# EAGLE board OSO-MISC-21-024 Temperature + GPIO + I2C Alternate 2 (EAGLE 9.6.2)
REV: D
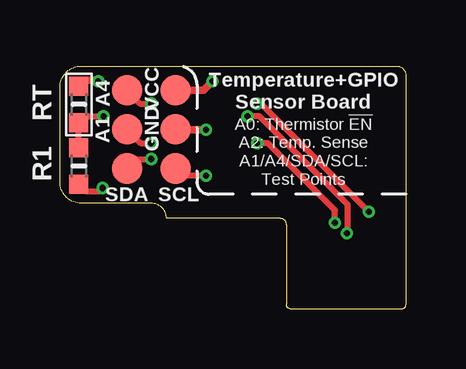
[diagram p0: board, top side]
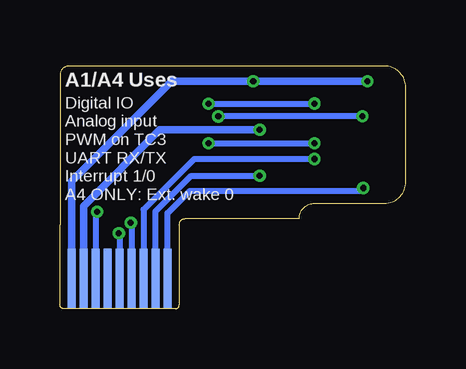
[diagram p1: board, bottom side, seen from below]

Size 14.43 x 10.1 mm. Coordinates in mm from the lower left corner, seen from the top.
Outline: 9.45,3.5 arc90 9.2,3.75 4.45,3.75 arc90 3.81,4.39 0.89,4.39 arc-90 0,5.28 0,9.21 arc-90 0.89,10.1 14.05,10.1 arc-90 14.43,9.72 14.43,3.5
Copper layers (1*16): Top 0.035559375mm / dielectric 1.6mm / Bottom 0.035559375mm
Design rules "oshpark-2layer *": minimum track width 6mil, minimum drill 10mil, track to track 6mil, track to pad 6mil, pad to pad 6mil, via to via 6mil, smd to smd 6mil, copper to edge 15mil, drill to drill 6mil, minimum pad ring 5mil, minimum via ring 5mil, stop-mask expansion 2.5mil, vias tented up to drill 12mil, thermal gap 10mil
Net classes: 0 default: width 0.203 mm; 1 power: width 0.203 mm; 2 gnd: width 0.203 mm

## Footprints (pad centres in the part's own frame; a part is rotated, then mirrored left to right if it is on the bottom)
B1,27 = smd 1.27 x 1.27: TP 0,0
_0603MP = smd 0.8 x 0.8: 1 -0.762,0; 2 0.762,0
FH19C9S05SH10-FFC = smd 0.347 x 2.5 bottom: 1 2,-2.25; 2 1.5,-2.25; 3 1,-2.25; 4 0.5,-2.25; 5 0,-2.25; 6 -0.5,-2.25; 7 -1,-2.25; 8 -1.5,-2.25; 9 -2,-2.25

## Placement (x,y rotation side)
A1  TPB1,27  [B1,27]  2.79,7.46 0 top
A4  TPB1,27  [B1,27]  2.79,9.09 0 top
GND  TPB1,27  [B1,27]  4.83,7.46 0 top
R1  1% 10K  [_0603MP]  0.79,5.94 270 top
RT  NTC 10K  [_0603MP]  0.79,8.5 270 top
SCL  TPB1,27  [B1,27]  4.83,5.84 0 top
SDA  TPB1,27  [B1,27]  2.79,5.84 0 top
U$3  FH19C-9S-0.5SH_10-FFC  [FH19C9S05SH10-FFC]  11.94,3.5 0 top
VCC  TPB1,27  [B1,27]  4.83,9.09 0 top

## Library data of the parts
A1 A4 GND SCL SDA VCC = testpad
R1 RT = microbuilder
U$3 = FH19C-9S-0.5SH

## Nets
A0_TEMP_ENABLE: R1.2 U$3.9
A1_SERCOM3.3: A1.TP U$3.6
A2_TEMP_SENSE: R1.1 RT.2 U$3.5
A3: U$3.4
A4_SERCOM3.2_TC3.0: A4.TP U$3.3
GND [gnd]: GND.TP U$3.2
SCL: SCL.TP U$3.8
SDA: SDA.TP U$3.7
VCC [power]: RT.1 U$3.1 VCC.TP

## Tracks (layer width: path | path; a pad name or v marks a point on that pad's centre or on a via)
A0_TEMP_ENABLE  (via drill 0.25)
  Top 0.254: R1.2 1.07,4.9 1.65,4.9 v1.78,5.02
  Bottom 0.254: U$3.9 9.94,3.98 9.02,4.9 1.91,4.9 v1.78,5.02
A1_SERCOM3.3  (via drill 0.25)
  Top 0.254: v11.47,3.57 11.47,4.09 8.68,6.89 v8.23,6.89 | A1.TP 3.37,6.89 v3.81,6.89
  Bottom 0.254: v11.47,3.57 11.44,3.54 U$3.6 | v8.23,6.89 v3.81,6.89
A2_TEMP_SENSE  (via drill 0.25)
  Top 0.254: v11.97,3.14 12.01,3.17 12.01,4.33 8.33,8.01 v7.82,8.01 | R1.1 RT.2 1.05,8.01 v1.82,8.01
  Bottom 0.254: v11.97,3.14 11.94,3.11 U$3.5 | v1.82,8.01 v7.82,8.01
A4_SERCOM3.2_TC3.0  (via drill 0.25)
  Top 0.254: v12.88,4.04 8.38,8.54 v8.23,8.54 | A4.TP 3.34,8.54 v3.81,8.54
  Bottom 0.254: v12.88,4.04 12.94,3.98 U$3.3 | v3.81,8.54 8.19,8.54 v8.23,8.54
GND  (via drill 0.25)
  Top 0.305: v6.1,7.45 4.84,7.45 GND.TP
  Bottom 0.305: U$3.2 13.44,4.27 10.26,7.45 v6.1,7.45
SCL  (via drill 0.25)
  Top 0.254: v6.1,5.53 5.13,5.53 SCL.TP
  Bottom 0.254: U$3.8 10.44,4.05 8.96,5.53 v6.1,5.53
SDA  (via drill 0.25)
  Top 0.254: SDA.TP 3.19,6.23 v3.81,6.23
  Bottom 0.254: v3.81,6.23 8.83,6.23 10.94,4.12 U$3.7
VCC  (via drill 0.25)
  Top 0.305: RT.1 1.04,9.52 1.55,9.52 v1.6,9.47 | VCC.TP 5.98,9.09 v6.36,9.47
  Bottom 0.305: U$3.1 13.94,5.31 9.78,9.47 v6.36,9.47 v1.6,9.47

## Text on the board
tPlace: Temperature+GPIO / Sensor Board | A0: Thermistor !EN / A2: Temp. Sense / A1/A4/SDA/SCL: / Test Points
bPlace: A1/A4 Uses | Digital IO / Analog input / PWM on TC3 / UART RX/TX / Interrupt 1/0 / A4 ONLY: Ext. wake 0